# Altium PCB PCB.PcbDoc
Units mm, origin at the board's own origin, x right, y up, seen from the top; angles counter-clockwise.
Board outline 84.9 x 66.06 mm, 2 copper layers (Top Layer, Bottom Layer); 33 components, 31 nets, 158 pads, 69 vias.
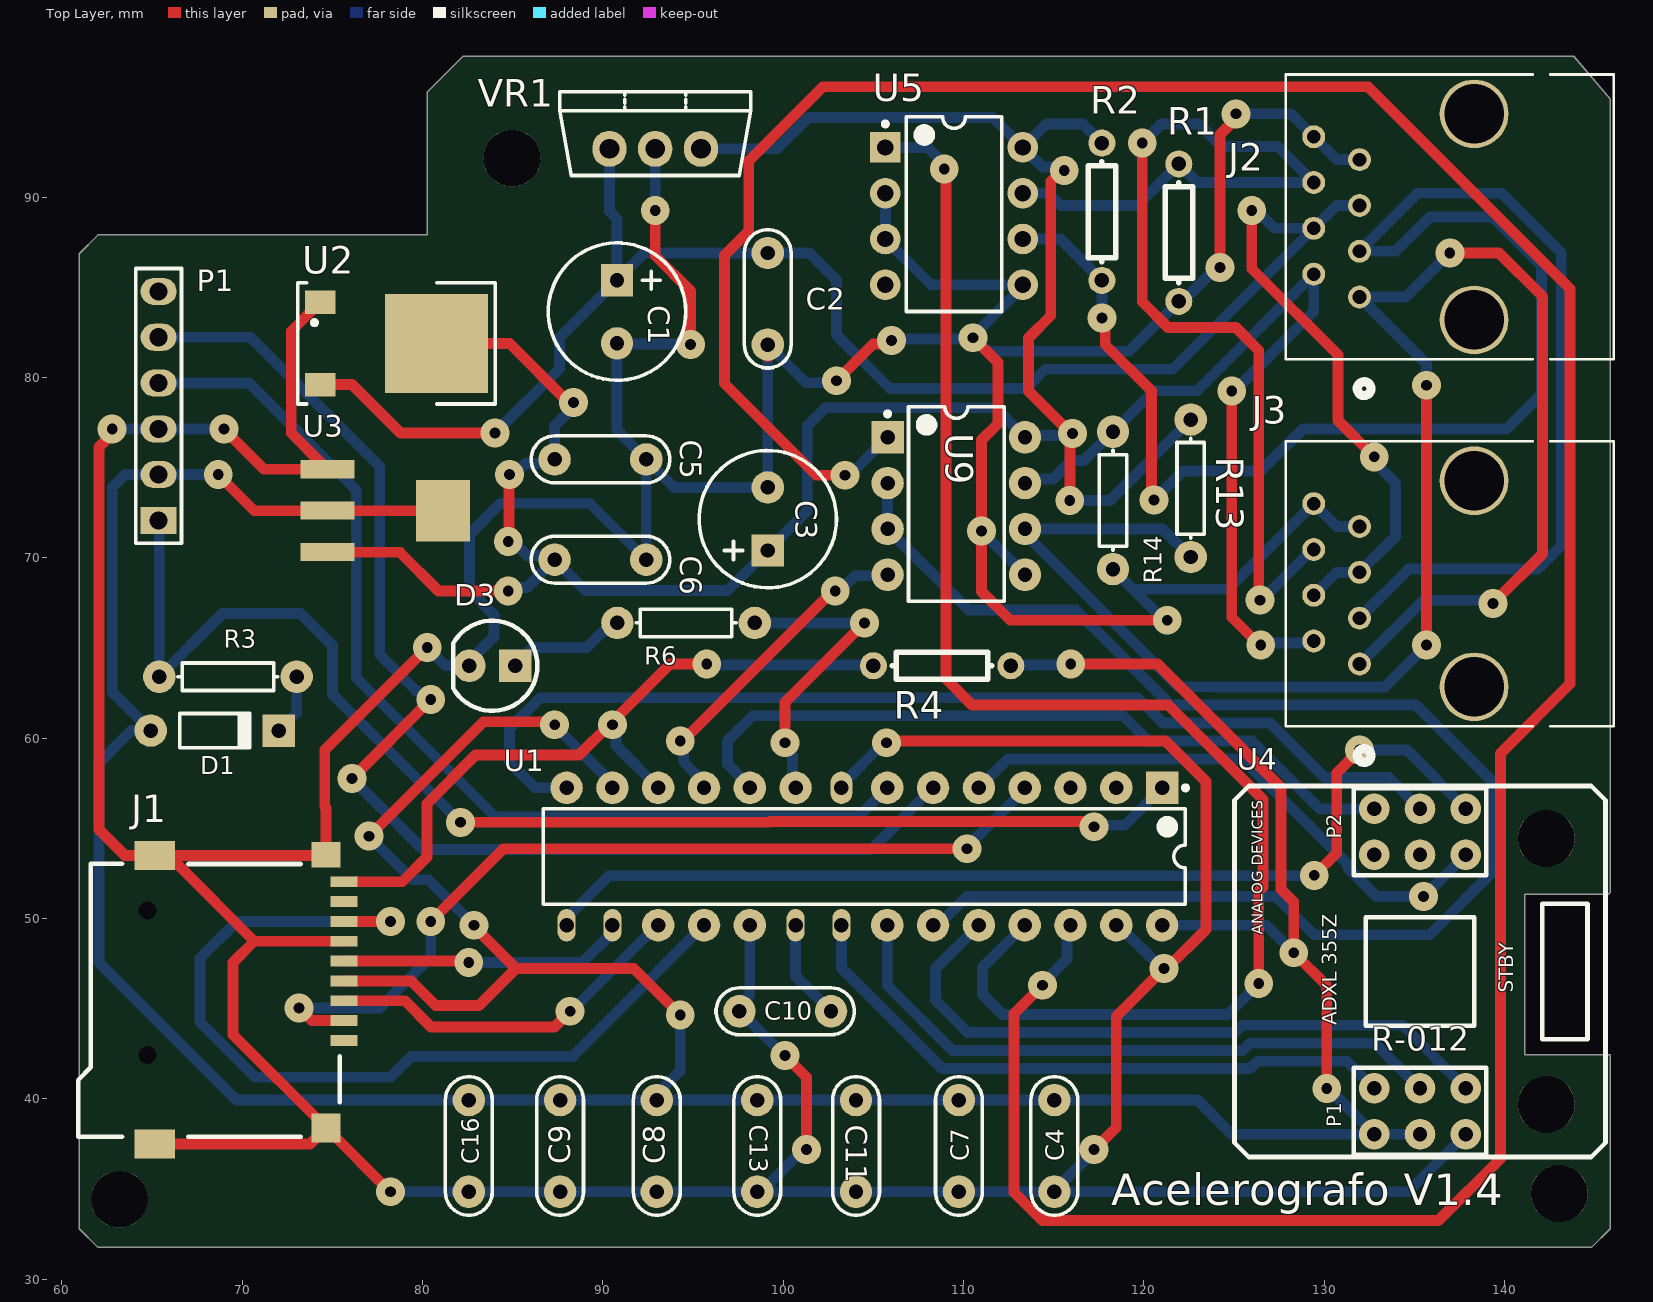
[diagram p0: Top Layer view]
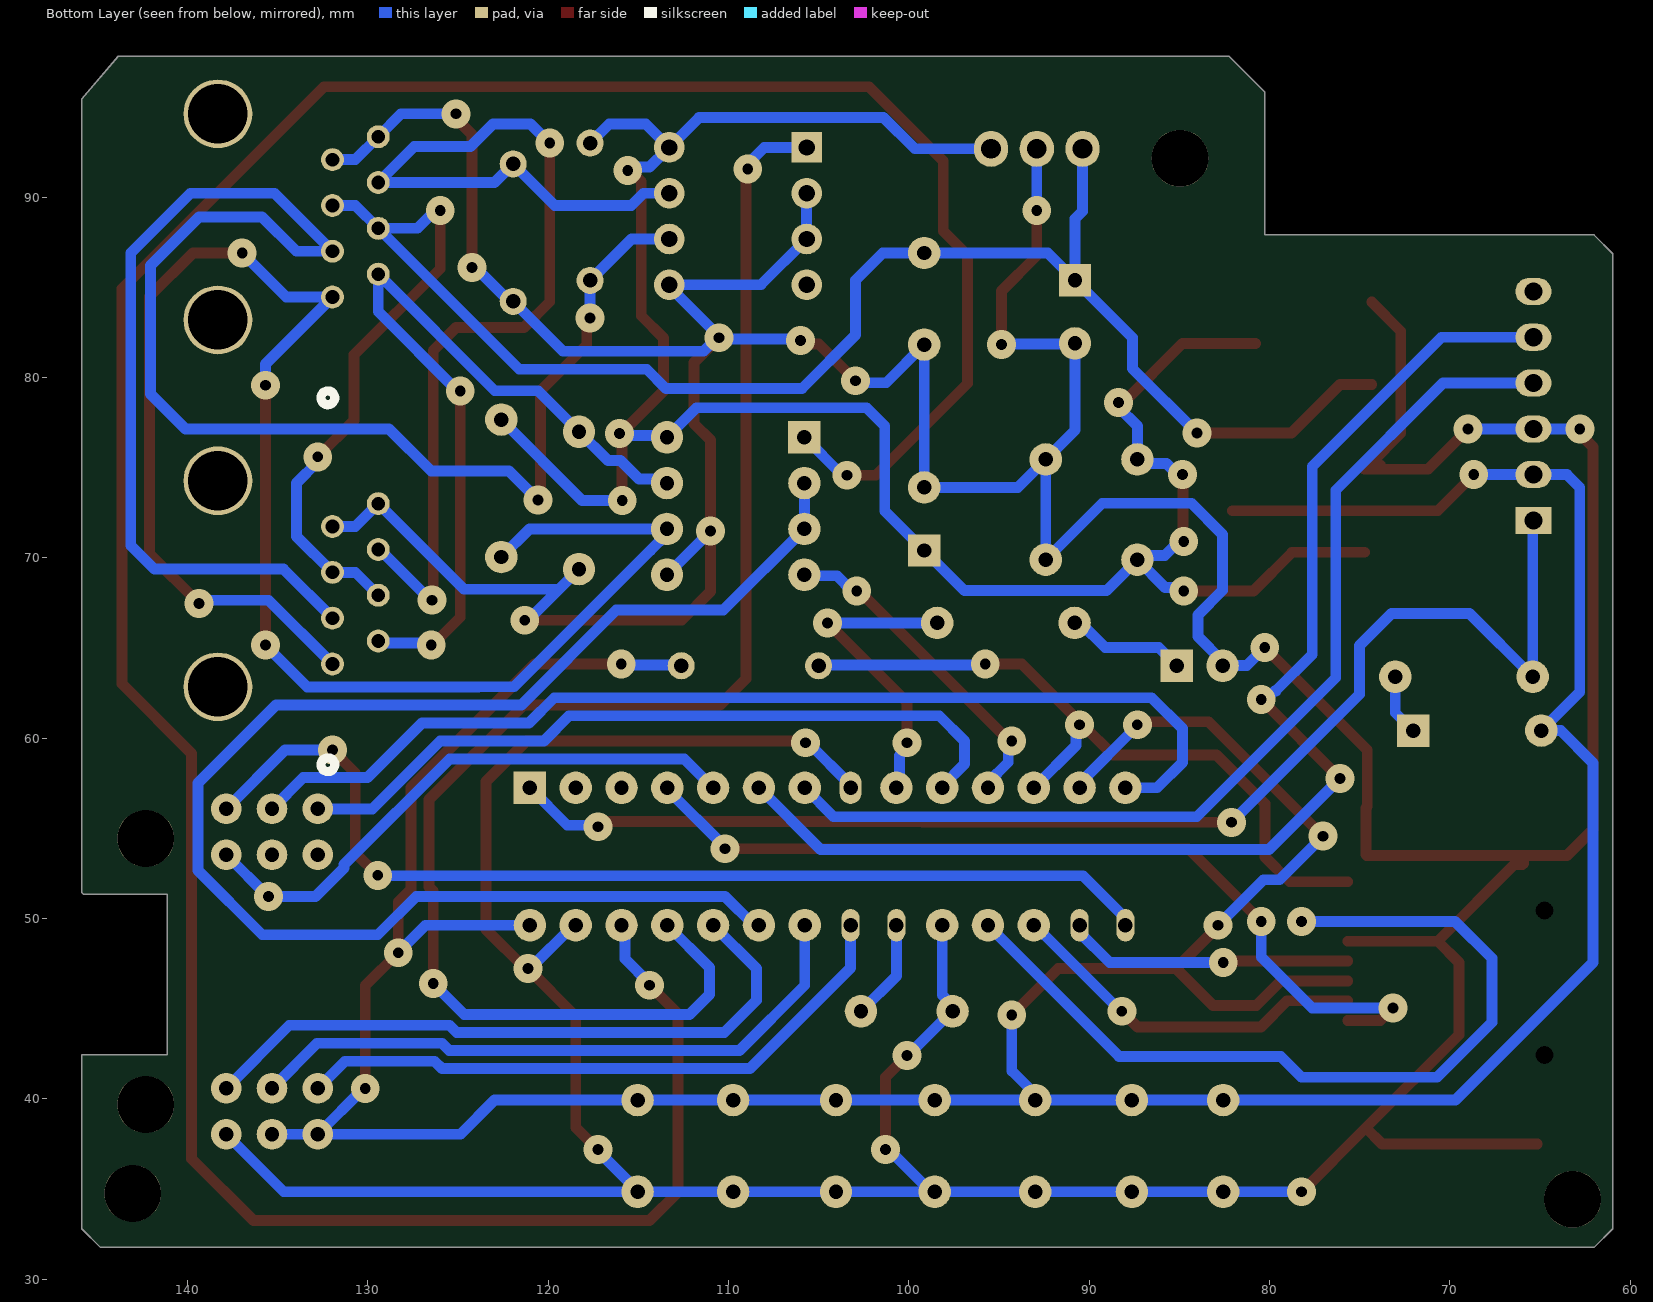
[diagram p1: Bottom Layer view, seen from below]

## Layer stack, top to bottom
Top Solder: solder mask 0.0102, Solder Resist, Dk 3.5
Top Layer: signal copper 0.0356
Dielectric 1: dielectric 0.32, FR-4, Dk 4.8
Bottom Layer: signal copper 0.0356
Bottom Solder: solder mask 0.0102, Solder Resist, Dk 3.5

## Board outline
141.12,42.442 141.12,51.343 145.769,51.343 145.86,51.434 145.86,57.252 145.86,66 145.86,95.429 143.832,97.811 82.241,97.811 80.26,95.83 80.26,87.898 62,87.898 60.96,86.858 60.96,32.79 62,31.75 144.82,31.75 145.86,32.79 145.86,42.442

## Design rules (kind name [scope] priority, off if disabled: settings)
Clearance [All] p1: gap=0.4 ignorepadtopadclearanceinfootprint=FALSE except(0.7: Arc-Poly Track-Poly SMDPad-Poly THPad-Poly Via-Poly Fill-Poly Poly-Poly Poly-Region Poly-Text)
HoleSize [All] p1: absolutevalues=TRUE maxlimit=20 minlimit=0.025 maxpercent=80.000 minpercent=20.000
PlaneClearance [All] p1: clearance=0.8
PlaneConnect [All] p1: planeconnectstyle=Relief reliefexpansion=0.6 reliefentries=4 reliefconductorwidth=0.4 reliefairgap=0.5
PolygonConnect [All] p1: connectstyle=Relief reliefconductorwidth=0.4 reliefentries=4 polygonreliefangle="90 Angle" airgapwidth=0.5
RoutingVias [All] p1: holewidth=0.6 width=1.6 viastyle="Through Hole" minholewidth=0.6 minwidth=1.4 maxholewidth=0.6 maxwidth=1.6
SolderMaskExpansion [All] p1: expansion=0.102 istentingtop=FALSE
Width [All] p1: maxlimit=1.5 minlimit=0.02 preferedwidth=0.6 minimp=50.000000 maximp=50.000000 favimp=50.000000
27 further rules are at their usual default settings.

## Components (designator, comment, footprint, x,y, rotation, side; value= is the part's Value field where it differs from the comment)
C1 "Cap" C100UFB 90.784,85.388 r270 top value=470uF
C2 "Cap" RAD0.2 99.143,86.897 r270 top value=100nF
C3 "Cap" C100UFB 99.143,70.399 r90 top value=220uF
C4 "Cap" RAD0.2 115.038,39.92 r270 top value=100nF
C5 "Cap" RAD0.2 87.325,75.453 r0 top value=100nF
C6 "Cap" RAD0.2 87.325,69.891 r0 top value=10nF
C7 "Cap" RAD0.2 109.744,39.92 r270 top value=100nF
C8 "Cap" RAD0.2 92.992,39.92 r270 top value=100nF
C9 "Cap" RAD0.2 87.626,39.92 r270 top value=10nF
C10 "Cap" RAD0.2 102.652,44.847 r180 top value=1uF
C11 "Cap" RAD0.2 104.037,39.92 r270 top value=100nF
C13 "Cap" RAD0.2 98.562,39.92 r270 top value=100nF
C16 "Cap" RAD0.2 82.567,39.92 r270 top value=100nF
D1 "1N914" DO-35 68.476,60.413 r0 top
D3 "LED3" LED2 83.867,64.009 r180 top
J1 "=Value" microSD 75.654,43.235 r90 top
J2 "54602-908LF" RJ45_CONN8_2-908LF_AMP 131.962,84.455 r90 top
J3 "54602-908LF" RJ45_CONN8_2-908LF_AMP 131.962,64.109 r90 top
P1 "Grabador" HDR1X6 65.361,72.066 r90 top
R1 "Res1" AXIAL-0.3#1 121.938,91.836 r270 top value=3K3
R2 "Res1" AXIAL-0.3#1 117.67,85.375 r90 top value=3K3
R3 "Res1" AXIAL-0.3#2 69.21,63.398 r0 top value=4K7
R4 "Res1" AXIAL-0.3#1 112.619,64.009 r180 top value=10K
R6 "Res1" AXIAL-0.3#2 94.615,66.386 r180 top value=1K
R13 "Res1" AXIAL-0.3#2 122.596,73.848 r90 top value=3K3
R14 "Res1" AXIAL-0.3#2 118.287,73.176 r270 top value=3K3
U1 "DSPIC33EP256MC202-I/SP" MCHP-SPDIP-SP28 104.499,53.431 r270 top
U2 "LM1117DT-5.0NOPB" NDP0003B 78.632,81.888 r0 top
U3 "LD33V" SOT-223 74.728,74.906 r270 top
U4 "ADXL355Z" ADXL355Z 135.312,47.053 r90 top
U5 "MAX485" MAX485#1 105.664,92.753 r270 top
U9 "MAX485" MAX485#2 105.789,76.676 r270 top
VR1 "Volt Reg" TO-220V 90.361,92.674 r0 top

## Footprints (in the part's own frame and the unit in brackets; to place one, negate y for a bottom-side part, rotate by r counter-clockwise, add the part's x,y. Pads: shape width x height; smd on the part's side, far side on the other; paste and mask are expansions set on the pad)
ADXL355Z [mm]
  round 1.7 hole 0.8: 1(-6.48,2.54) 2(-6.48,0) 3(-6.48,-2.54) 4(-9.02,2.54) 5(-9.02,0) 6(-9.02,-2.54) 7(9.02,2.54) 8(9.02,0) 9(9.02,-2.54) 10(6.48,2.54) 11(6.48,0) 12(6.48,-2.54)
  round 3.15 hole 3.15: ""(-7.375,-7) ""(7.375,-7)
  round 0 all layers, no hole paste-2539.97 mask+0: ""(-7.375,7) ""(7.375,7)
  silkscreen extent -10.29,-10.29 10.29,10.29
AXIAL-0.3#1 [mm]
  round 1.5 hole 0.8: 1(0,0) 2(7.62,0)
  silkscreen extent 1.04,-0.76 6.58,0.76
AXIAL-0.3#2 [mm] "Axial Device, Thru-Hole; 2 Leads; 0.3 in Pin Spacing"
  round 1.8 hole 0.8: 1(-3.81,0) 2(3.81,0)
  silkscreen extent -2.77,-0.76 2.77,0.76
C100UFB [mm]
  rect 1.8x1.8 hole 0.8: 1(0,0)
  round 1.8 hole 0.8: 2(3.5,0)
  silkscreen extent -2.07,-3.81 5.55,3.81
DO-35 [mm] "Diode, Axial; Body 3.8 x 1.9 mm (LxDia. max), Lead Dia. 0.53 mm (max)"
  round 1.8 hole 0.8: 1(-3.55,0)
  rect 1.8x1.8 hole 0.8: 2(3.55,0)
  silkscreen extent -1.95,-0.95 2.05,0.95
HDR1X6 [mm] "Connector; Header; 6 Position"
  rect 1.5x2 hole 1: 1(0,0)
  oval 1.5x2 hole 1: 2(2.54,0) 3(5.08,0) 4(7.62,0) 5(10.16,0) 6(12.7,0)
  silkscreen extent -1.27,-1.27 13.97,1.27
LED2 [mm]
  rect 1.8x1.8 hole 0.8: 1(-1.27,0)
  round 1.8 hole 0.8: 2(1.27,0)
  silkscreen extent -2.5,-2.5 2.17,2.5
MAX485#1 [mm]
  rect 1.7x1.7 hole 0.9: 1(0,0)
  round 1.7 hole 0.9: 2(2.54,0) 3(5.08,0) 4(7.62,0) 5(7.62,7.62) 6(5.08,7.62) 7(2.54,7.62) 8(0,7.62)
  silkscreen extent -1.69,-0.12 9.1,6.46, body extent -1.64,0.2 9,7.41, height 5.34
MAX485#2 [mm]
  rect 1.8x1.8 hole 0.8: 1(0,0)
  round 1.8 hole 0.8: 2(2.54,0) 3(5.08,0) 4(7.62,0) 5(7.62,7.62) 6(5.08,7.62) 7(2.54,7.62) 8(0,7.62)
  silkscreen extent -1.69,-0.12 9.1,6.46, body extent -1.64,0.2 9,7.41, height 5.34
MCHP-SPDIP-SP28 [mm] "DIP, 28-Leads, Body 34.86x6.79mm, Pitch 2.54mm"
  rect 1.8x1.8 hole 0.8: 1(-3.81,16.51)
  round 1.8 hole 0.8: 2(-3.81,13.97) 3(-3.81,11.43) 4(-3.81,8.89) 5(-3.81,6.35) 6(-3.81,3.81) 7(-3.81,1.27) 9(-3.81,-3.81) 10(-3.81,-6.35) 11(-3.81,-8.89) 12(-3.81,-11.43) 13(-3.81,-13.97) 14(-3.81,-16.51) 17(3.81,-11.43) 18(3.81,-8.89) 19(3.81,-6.35) 22(3.81,1.27) 23(3.81,3.81) 24(3.81,6.35) 25(3.81,8.89) 26(3.81,11.43) 27(3.81,13.97) 28(3.81,16.51)
  oval 1.8x1.2 hole 0.8: 8(-3.81,-1.27)
  oval 1.8x1 hole 0.8: 15(3.81,-16.51) 16(3.81,-13.97) 20(3.81,-3.81) 21(3.81,-1.27)
  silkscreen extent -3.93,-17.8 2.65,17.94, body extent -3.95,-17.77 3.95,17.77, height 5.08
microSD [mm]
  rect 0.6x1.5 smd: 1(0,0) 2(1.1,0) 3(2.2,0) 4(3.3,0) 5(4.4,0) 6(5.5,0) 7(6.6,0) 8(7.7,0) 9(8.8,0)
  rect 1.6x2.26 smd: 10(-5.75,10.5) 10(10.25,10.5)
  rect 1.6x1.6 smd: 10(-4.85,1)
  rect 1.4x1.6 smd: 10(10.3,1)
  round 0.8 hole 1: ""(-0.8,10.9) ""(7.2,10.9)
  silkscreen extent -5.33,0.25 9.8,14.75, body extent -5.75,-0.35 10.25,14.9, height 1.95
NDP0003B [mm]
  rect 1.7x1.3 smd paste+0 mask+0.051: 1(-4.3,2.285) 3(-4.3,-2.285)
  rect 5.7x5.5 smd paste+0 mask+0.051: 4(2.14,0)
  silkscreen extent -5.55,-3.36 5.39,3.36, body extent -4.83,-3.27 5.08,3.27, height 2.55
RAD0.2 [mm]
  round 1.8 hole 0.8: 1(0,0) 2(5.08,0)
  silkscreen extent -1.3,-1.3 6.38,1.3
RJ45_CONN8_2-908LF_AMP [mil] "Conector hembra RJ45 Plastico"
  round 50 / inner round 60 / far side round 50 hole 30 paste-99999 mask+0: 1(0,0) 2(50,100) 3(100,0) 4(150,100) 5(200,0) 6(250,100) 7(300,0) 8(350,100)
  round 150 / inner round 60 / far side round 150 hole 130 paste-99999 mask-75: 9(-50,-250) 10(400,-250)
  silkscreen extent -215,-555 486,161
SOT-223 [mm]
  rect 1x3 smd: 1(4.6,0) 2(0,0) 3(2.3,0)
  rect 3.4x3 smd: 3(2.3,6.4)
  body extent -1.2,1.41 5.8,5, height 1.1
TO-220V [mm] "D2-PAK, 4-Leads, Body 8.8x10.4mm, Pitch 2.54mm, Lead Span 15.1mm, IPC Medium Density"
  oval 1.9x2 hole 1.1: 1(0,0) 2(2.54,0) 3(5.08,0)
  silkscreen extent -2.75,-1.48 7.83,3.18, body extent -2.56,-1.8 7.6,2.8, height 18.9

## Part data
C1 C2 C3 C4 C5 C6 C7 C8 C9 C10 C11 C13 C16: "Capacitor", LatestRevisionDate=17-Jul-2002, LatestRevisionNote="Re-released for DXP Platform.", PackageDescription="Radial Cap, Thru-Hole; 2 Leads; 0.3 in Pin Spacing", PackageReference=RAD-0.3, Published=8-Jun-2000, Publisher="Altium Limited"
D1: library part "Diode 1N914", "High Conductance Fast Diode", Code_JEDEC=DO-204-AH, ComponentLink1Description="Manufacturer Link", ComponentLink1URL=http://www.fairchildsemi.com/, ComponentLink2Description=Datasheet, ComponentLink2URL=http://www.fairchildsemi.com/ds/1N%2F1N4448.pdf, DatasheetVersion=1997, LatestRevisionDate=17-Jul-2002, LatestRevisionNote="Re-released for DXP Platform.", PackageDescription="Diode, Axial; Body 3.8 x 1.9 mm (LxDia. max), Lead Dia. 0.53 mm (max)", PackageReference=DO-35, Published=8-Jun-2000, Publisher="Altium Limited"
D3: "Typical BLUE SiC LED", DatasheetVersion=16-Apr-2002, LatestRevisionDate=17-Dec-2003, LatestRevisionNote="PCB Footprint replaced.", PackageDescription="SM LED; 2 C-Bend Leads; Body 3.5 x 2.8 x 1.9 mm, inc leads (LxWxH typ)", PackageReference=3.5X2.8X1.9, PackageVersion=16-Apr-2002, Published=8-Jun-2000, Publisher="Altium Limited"
J1: library part MICROSD, "=Description"
J2 J3: "Jack Modular Connector 8p8c _RJ45, Ethernet_ 90Â° Angle _Right_ Unshielded Cat3", Package=None, Digi-Key_Part_Number=609-1046-ND, Digi-Key_Purchase_URL=https://www.digikey.com/product-detail/en/amphenol-icc-fci/54602-908LF/609-1046-ND/1001360?utm_source=snapeda&utm_medium=aggregator&utm_campaign=symbol, MF="Amphenol ICC", MP=54602-908LF, SnapEDA_Link=https://www.snapeda.com/parts/54602-908LF/Amphenol%20FCI/view-part/1356963/?ref=snap
P1: library part "Header 6", "Header, 6-Pin", LatestRevisionDate=17-Jul-2002, LatestRevisionNote="Re-released for DXP Platform.", Publisher="Altium Limited"
R1 R2 R3 R4 R6 R13 R14: "Resistor", LatestRevisionDate=17-Jul-2002, LatestRevisionNote="Re-released for DXP Platform.", PackageDescription="Axial Device, Thru-Hole; 2 Leads; 0.3 in Pin Spacing", PackageReference=AXIAL-0.3, Published=8-Jun-2000, Publisher="Altium Limited"
U1: "16-Bit Microcontroller and Digital Signal Controller with High-Speed PWM, Op Amps and Advanced Analog, 70 MIPS, 21 I/O, GPIO, -40 to 85 degC, 28-pin SPDIP (SP28), Tube", Manufacturer=Microchip, Supplier Part Number 1=DSPIC33EP256MC202-I/SP-ND, ComponentLink1Description="Manufacturer URL", ComponentLink1URL=http://www.microchip.com, ComponentLink2Description=Datasheet, ComponentLink2URL=http://ww1.microchip.com/downloads/en/DeviceDoc/70657F.pdf, ComponentLink3Description="Package Specification", ComponentLink3URL=http://www.microchip.com/stellent/groups/techpub_sg/documents/packagingspec/en012702.pdf, ComponentLink4Description="Product URL", ComponentLink4URL=http://www.microchip.com/dsPIC33EP256MC202, DatasheetVersion="Rev. F", Mounting Technology="Through Hole", PackageDescription="28-Lead Plastic Dual In-Line, 34.86 x 6.79 mm Body, 2.54 mm Pitch", PackageReference=SPDIP-SP28, PackageVersion=C04-070B, PartNumber=DSPIC33EP256MC202-I/SP, Supplier 1=Digi-Key, Supplier 2=Farnell, Supplier 3=Newark, Supplier 4=Mouser, Supplier Part Number 2=2212194, Supplier Part Number 3=66T8001, Supplier Part Number 4=579-PC33256MC202ISP
U2: "No Description Available", Mfr_Name="Texas Instruments", RefDes=RefDes, TYPE=TYPE
U3: "High-Performance 16-bit Digital Signal Controller, 24 KB Flash, 2 KB SRAM, 1 KB EEPROM, 40-Pin PDIP, Industrial Temperature"
VR1: "Voltage Regulator", LatestRevisionDate=29-May-2009, LatestRevisionNote="IPC-7351 Footprint Added.", PackageDescription="3-Pin Transistor Outline Package 2.54 mm Pitch, 15.1 mm Lead Span", PackageReference=D2PAK, Published=24-Mar-1999, Publisher="Altium Limited"

## Free pads (board coordinates)
  round 3.15 hole 3.15: ""(63.193,34.425) ""(84.96,92.148) ""(143.032,34.748)

## Via types
v1: diameter 1.6, hole 0.6, Top Layer to Bottom Layer, 69 vias

## Nets (pads, with @x,y where several pads share a name; then routed paths per layer and width w, separated by ;. In a path a pad name is that pad's centre, name@x,y a point inside that pad or via, vN(x,y) a via of type N, cw(c..) or ccw(c..) an arc to the next point about the centre after c; other vN are vias at no path point)
5V: C3.1 C5.1 C6.1 R2.2 R13.2 U2.4 U3.1 U5.8 U9.8 VR1.3 | length 130.3
  Top Layer w0.6: U3.1 78.741,70.306 80.885,68.162 v1(84.754,68.162) ; U2.4 84.821,81.888 88.096,78.612 v1(88.366,78.612) ; v1(84.754,70.902) 84.788,70.935 84.788,74.573 v1(84.821,74.606) ; U5.8@113.284,92.456 U5.8 ; v1(115.583,91.468) 115.446,91.468 114.834,90.855 114.834,83.422 113.598,82.186 113.598,79.251 115.963,76.886 v1(116.046,76.886) 115.91,76.749 115.91,73.195 v1(115.891,73.176)
  Bottom Layer w0.6: v1(84.754,68.162) 84.946,68.354 85.788,68.354 C6.1 ; v1(84.754,70.902) 85.025,70.902 85.806,70.121 87.096,70.121 C6.1 ; v1(84.821,74.606) 85.091,74.606 85.709,75.223 87.096,75.223 C5.1 87.555,75.682 87.325,75.912 87.325,77.301 88.366,78.342 v1(88.366,78.612) ; VR1.3 99.659,92.674 101.397,94.412 111.625,94.412 113.427,92.61 114.378,91.659 115.392,91.659 v1(115.583,91.468) ; U5.8 114.584,94.053 116.612,94.053 R2.2 ; v1(115.891,73.176) 118.114,73.176 R13.2 ; v1(116.046,76.886) 115.941,76.781 113.514,76.781 U9.8 111.769,78.316 102.343,78.316 101.328,77.301 101.328,72.584 C3.1 96.918,68.174 89.043,68.174 C6.1
_PGEC1: P1.5 U1.6 | length 71.3
  Top Layer w0.6: v1(76.082,57.762) 76.082,57.764 80.457,62.139 v1(80.457,62.141)
  Bottom Layer w0.6: P1.5 70.454,82.226 77.628,75.051 77.628,64.635 79.646,62.617 79.71,62.617 80.186,62.141 v1(80.457,62.141) ; v1(76.082,57.762) 80.018,53.826 104.895,53.826 U1.6 U1.6@108.08,57.47
_PGED1: P1.4 U1.7 | length 57.3
  Bottom Layer w0.6: P1.4 70.383,79.686 76.327,73.742 76.327,63.342 84.028,55.641 104.169,55.641 U1.7 U1.7@105.576,57.241
A: J2.1 J3.1 R13.1 U9.6 | length 96.9
  Top Layer w0.6: v1(135.669,65.151) v1(135.669,79.566) ; v1(136.966,86.9) 139.692,86.9 142.099,84.494 142.099,70.213 v1(139.356,67.47)
  Bottom Layer w0.6: R13.1 121.038,71.596 U9.6 113.409,71.318 114.331,70.396 114.336,70.396 121.891,62.841 123.856,62.841 123.858,62.839 133.357,62.839 v1(135.669,65.151) ; J3.1 135.499,67.646 139.18,67.646 v1(139.356,67.47) ; v1(135.669,79.566) 135.669,80.748 J2.1 134.521,84.455 v1(136.966,86.9)
ADXL_DRDY: U1.24 U4.3 | length 36.9
  Bottom Layer w0.6: U1.24 108.444,47.216 108.444,45.463 110.235,43.672 125.064,43.672 125.465,44.073 134.352,44.073 U4.3
ADXL_INT1: U1.21 U4.1 | length 35
  Bottom Layer w0.6: U1.21 103.229,47.244 108.801,41.672 125.892,41.672 126.294,42.073 131.272,42.073 U4.1
ADXL_INT2: U1.22 U4.2 | length 35.6
  Bottom Layer w0.6: U1.22 105.769,46.29 109.387,42.672 125.478,42.672 125.879,43.073 132.812,43.073 U4.2
B: J2.2 J3.2 R14.1 U9.7 | length 47.1
  Top Layer w0.6: v1(124.874,79.251) 124.874,66.699 126.422,65.151 v1(126.483,65.151)
  Bottom Layer w0.6: U9.7 113.638,74.365 114.959,74.365 115.979,75.386 116.687,75.386 R14.1 120.56,79.258 122.955,79.258 J2.2 129.422,83.648 125.025,79.251 v1(124.874,79.251) ; v1(126.483,65.151) 126.596,65.265 129.308,65.265 J3.2
CONSD: J1.9 R4.2 U1.12 | length 40.7
  Top Layer w0.6: J1.9 78.871,52.035 80.241,53.405 80.241,56.357 82.939,59.055 88.678,59.055 90.363,60.74 v1(90.529,60.74) ; v1@90.446,60.823 93.732,64.109 v1(95.758,64.109)
  Bottom Layer w0.6: v1(90.529,60.74) 90.721,60.548 90.721,59.589 U1.12 ; v1(95.758,64.109) 95.808,64.059 104.949,64.059 R4.2
DSPIC_RX: U1.26 U9.1 | length 171.8
  Top Layer w0.6: v1(103.429,74.573) 101.837,74.573 96.735,79.674 96.735,86.752 98.094,88.11 98.094,91.998 102.211,96.115 132.432,96.115 143.629,84.918 143.629,63.008 139.772,59.15 139.772,36.668 136.344,33.24 114.375,33.24 112.801,34.815 112.801,44.716 v1(114.375,46.29)
  Bottom Layer w0.6: v1(103.429,74.573) 103.686,74.573 U9.1 ; v1(114.375,46.29) 114.375,46.396 115.736,47.757 115.736,49.427 U1.26
DSPIC_TX: U1.11 U9.4 | length 18.5
  Top Layer w0.6: v1(94.292,59.839) 94.426,59.839 102.75,68.162 v1(102.884,68.162)
  Bottom Layer w0.6: v1(94.292,59.839) 94.483,59.648 94.483,58.66 95.609,57.534 U1.11 ; v1(102.884,68.162) 103.155,68.162 103.989,68.996 105.729,68.996 U9.4
FUENTE_12V: C1.1 C2.1 J2.4 J2.5 J3.4 J3.5 U2.3 VR1.1 | length 111.6
  Top Layer w0.6: U2.3 76.082,79.603 78.773,76.911 v1(84.022,76.911) ; v1(125.984,89.253) 125.984,86.028 130.759,81.253 130.759,77.607 v1(132.772,75.595)
  Bottom Layer w0.6: v1(84.022,76.911) 87.594,80.484 87.594,82.198 C1.1 ; VR1.1 90.361,89.217 90.784,88.793 C1.1 92.294,86.897 C2.1 101.444,86.897 102.953,85.388 102.953,82.352 105.93,79.375 113.46,79.375 114.534,80.449 121.606,80.449 J2.4 ; v1(125.984,89.253) 126.255,89.253 127.243,88.265 J2.4 ; J3.4 130.692,69.189 J3.5 133.955,71.182 133.955,74.141 132.772,75.324 v1(132.772,75.595) ; J2.5 130.692,89.535 J2.4
GND: C1.2 C2.2 C3.2 C4.2 C5.2 C6.2 C7.2 C8.2 C9.2 C10.2 C11.2 C13.2 C16.2 D3.2 J1.6 J1.10 J2.7 J2.8 J3.7 J3.8 P1.3 R1.2 R14.2 U1.8 U1.19 U1.27 U2.1 U3.2 U4.6 U5.2 U5.3 U5.5 U9.5 VR1.2 | length 421.2
  Top Layer w0.6: v1(62.789,77.146) 62.789,76.875 62.052,76.138 62.052,54.932 63.5,53.485 65.155,53.485 J1.10@65.92,53.485 ; J1.10@65.155,37.485 73.754,37.485 J1.10@74.654,38.385 ; v1(68.986,77.146) 68.986,77.12 71.201,74.906 U3.2@73.825,74.906 ; U3.2@73.825,75.106 74.025,74.906 U3.2@74.376,74.906 ; U2.1 72.72,82.561 72.72,76.913 74.376,75.257 U3.2@74.376,74.906 ; U3.2 U3.2@74.376,74.906 ; J1.6 70.67,48.735 ; v1(78.22,34.84) 78.199,34.84 J1.10@74.654,38.385 ; v1(80.26,65.014) 74.582,59.336 74.582,56.196 74.654,56.123 74.654,53.535 74.604,53.485 J1.10@65.92,53.485 ; v1(92.901,89.253) 92.901,86.743 94.862,84.782 v1(94.862,81.817) ; C2.2@99.143,81.153 C2.2 ; v1(100.091,42.393) 101.295,41.188 v1(101.295,37.175) ; v1(102.953,79.816) 104.99,81.852 105.807,81.852 v1(105.999,82.044) ; v1(105.729,59.74) 105.832,59.842 121.197,59.842 123.442,57.598 123.442,49.389 121.269,47.216 v1(121.122,47.216) 118.469,44.563 118.469,38.407 v1(117.237,37.175) ; v1(110.525,82.198) 111.905,80.818 111.905,77.434 110.998,76.528 v1(110.998,71.473) 110.998,68.123 112.589,66.532 v1(121.299,66.532) ; v1(124.225,86.1) 124.225,93.465 125.105,94.344 v1(125.105,94.615) ; J2.8@129.422,93.164 J2.8 ; J1.10@65.92,53.485 65.92,53.05 65.985,52.985 66.42,52.985 70.67,48.735 ; 70.67,48.735 69.494,47.559 69.494,43.545 J1.10@74.654,38.385
  Bottom Layer w0.6: v1(62.789,77.146) P1.3 v1(68.986,77.146) ; v1(78.22,34.84) C16.2 85.09,34.84 C9.2 90.297,34.84 C8.2 95.758,34.84 C13.2 C13.2@98.761,34.84 ; v1(80.26,65.014) 81.258,64.016 82.59,64.016 D3.2 82.597,64.259 83.967,65.629 83.967,66.828 82.597,68.198 82.597,71.291 84.331,73.025 89.271,73.025 C6.2 C5.2 ; v1(92.901,89.253) VR1.2 ; v1(94.862,81.817) 94.827,81.852 90.819,81.852 C1.2 90.784,77.074 C5.2 ; U1.19 98.149,45.75 97.572,45.172 C10.2 97.604,44.847 100.059,42.393 v1(100.091,42.393) ; v1(101.295,37.175) 101.096,37.175 C13.2@98.761,34.84 ; v1(102.953,79.816) 102.845,79.707 101.253,79.707 C2.2 C3.2 93.959,73.899 C5.2 ; U1.8 103.229,57.39 105.579,59.74 v1(105.729,59.74) ; U5.2 U5.3 108.204,85.133 U5.5@113.149,85.133 ; v1(105.999,82.044) 106.076,82.121 110.448,82.121 v1(110.525,82.198) ; v1(110.998,71.473) 110.998,71.47 113.409,69.059 U9.5 ; U5.5 113.284,85.045 110.525,82.286 v1(110.525,82.198) ; C4.2@115.288,34.84 134.659,34.84 U4.6 ; v1(117.237,37.175) 117.237,37.108 115.038,34.908 C4.2 C7.2 106.883,34.84 C11.2 101.295,34.84 C13.2@98.761,34.84 ; R14.2 119.403,68.25 ; U1.27 118.593,49.621 120.998,47.216 v1(121.122,47.216) ; v1(121.299,66.532) 121.122,66.532 119.403,68.25 ; v1(124.225,86.1) 124.024,86.1 122.139,84.216 R1.2 119.171,81.449 111.376,81.449 110.627,82.198 v1(110.525,82.198) ; v1(125.105,94.615) 128.152,94.615 J2.8 130.692,92.075 J2.7 ; J3.7 130.692,71.729 J3.8 124.673,68.25 119.403,68.25
INT_SINC: U1.25 U5.1 | length 84.2
  Top Layer w0.6: v1(108.928,91.564) 109.025,91.468 109.025,63.293 110.477,61.841 121.353,61.841 126.599,56.595 126.599,51.743 126.374,51.518 v1(126.374,46.396)
  Bottom Layer w0.6: U5.1 108.011,92.753 ; 108.011,92.752 108.928,91.835 v1(108.928,91.564) ; U1.25 111.044,47.275 111.044,45.783 112.155,44.672 124.65,44.672 v1(126.374,46.396)
MAX485_MS: U1.23 U9.2 U9.3 | length 81
  Bottom Layer w0.6: U9.2 U9.3 110.292,67.092 116.225,67.092 121.477,61.841 123.442,61.841 123.444,61.839 135.094,61.839 139.421,57.512 139.421,52.654 135.856,49.09 129.445,49.09 127.314,51.221 110.187,51.221 108.587,49.621 U1.23
MCLR: P1.1 R3.1 U1.1 | length 73.2
  Top Layer w0.6: v1(82.104,55.326) 99.223,55.326 99.261,55.364 116.683,55.364 116.966,55.081 v1(117.237,55.081)
  Bottom Layer w0.6: P1.1 65.4,72.027 R3.1 68.905,66.904 73.228,66.904 74.999,65.133 74.999,62.431 v1(82.104,55.326) ; v1(117.237,55.081) 117.325,55.168 118.937,55.168 U1.1
NetC10_1: C10.1 U1.20 | length 5.6
  Bottom Layer w0.6: U1.20 100.689,46.81 C10.1
NetD1_2: D1.2 R3.2 | length 3.4
  Bottom Layer w0.6: D1.2 73.02,61.407 R3.2
NetD3_1: D3.1 R6.2 | length 6.7
  Bottom Layer w0.6: D3.1 86.142,65.014 89.108,65.014 90.48,66.386 R6.2
SINC_A: J2.3 J3.3 R2.1 U5.6 | length 104.9
  Top Layer w0.6: v1(117.67,83.289) 117.862,83.098 117.862,81.815 120.421,79.255 120.421,73.333 v1(120.56,73.195) ; J3.3@131.845,66.532 J3.3
  Bottom Layer w0.6: U5.6 115.372,87.673 R2.1 v1(117.67,83.289) ; v1(120.56,73.195) 122.168,74.803 126.483,74.803 128.819,77.14 140.108,77.14 142.052,79.084 142.052,86.203 139.356,88.9 135.86,88.9 133.955,86.995 J2.3 135.18,90.213 139.828,90.213 143.141,86.9 143.141,70.678 141.828,69.366 134.679,69.366 J3.3
SINC_B: J2.6 J3.6 R1.1 U5.7 | length 63.7
  Top Layer w0.6: v1(119.913,92.995) 119.913,84.19 121.337,82.766 125.107,82.766 126.374,81.499 126.374,67.716 v1(126.444,67.646)
  Bottom Layer w0.6: U5.7 114.716,90.213 115.395,89.535 119.637,89.535 R1.1 ; v1(119.913,92.995) 120.971,94.053 123.059,94.053 124.309,92.803 127.423,92.803 J2.6 122.968,90.805 R1.1 ; R1.1@121.694,91.836 R1.1 ; v1(126.444,67.646) 126.526,67.646 129.339,70.459 J3.6
SPI1_DSPIC_SS: J1.2 U1.4 | length 49.3
  Top Layer w0.6: v1(73.154,45.034) 73.854,44.335 J1.2 ; v1(80.457,49.831) 84.49,53.864 v1(110.187,53.864)
  Bottom Layer w0.6: v1(73.154,45.034) 77.628,45.034 80.457,47.863 v1(80.457,49.831) ; v1(110.187,53.864) 110.187,53.951 113.389,57.154 U1.4
SPI1_MISO: J1.7 U1.18 | length 50.2
  Top Layer w0.6: J1.7 v1(78.22,49.835)
  Bottom Layer w0.6: v1(78.22,49.835) 69.703,49.835 67.661,47.793 67.661,44.241 70.714,41.188 78.22,41.188 79.378,42.346 88.334,42.346 U1.18
SPI1_MOSI: J1.3 U1.17 | length 20.3
  Top Layer w0.6: J1.3 79.027,45.435 80.477,43.985 87.323,43.985 v1(88.186,44.847)
  Bottom Layer w0.6: v1(88.186,44.847) 88.241,44.847 93.014,49.621 U1.17
SPI1_SCK: J1.5 U1.16 | length 16
  Top Layer w0.6: J1.5 82.478,47.635 v1(82.564,47.549)
  Bottom Layer w0.6: v1(82.564,47.549) 88.858,47.549 90.529,49.221 U1.16
SPI2_ADXL355Z_CS: U1.10 U4.7 | length 41.7
  Bottom Layer w0.6: U1.10 98.149,57.323 96.918,58.555 96.918,59.842 98.315,61.24 118.836,61.24 120.235,59.841 122.613,59.841 122.615,59.839 125.985,59.839 129.751,56.073 U4.7
SPI2_MISO: U1.5 U4.12 | length 31.9
  Bottom Layer w0.6: U1.5 112.449,58.841 122.199,58.841 122.201,58.839 125.458,58.839 131.312,52.985 131.312,52.801 132.892,51.221 v1(135.499,51.221) 135.539,51.221 U4.12
SPI2_MOSI: U1.15 U4.9 | length 58.1
  Top Layer w0.6: v1(129.445,52.387) 130.692,53.634 130.692,58.069 v1(131.962,59.339)
  Bottom Layer w0.6: U1.15 88.12,49.751 88.12,50.151 90.333,52.364 129.422,52.364 v1(129.445,52.387) ; v1(131.962,59.339) 134.586,59.339 U4.9
SPI2_SCK: U1.14 U4.8 | length 59.4
  Bottom Layer w0.6: U1.14 86.229,57.241 84.821,58.649 84.821,60.525 86.535,62.24 119.664,62.24 121.063,60.841 123.028,60.841 123.029,60.839 126.99,60.839 130.022,57.807 133.578,57.807 U4.8
TEST1: R6.1 U1.9 | length 17.3
  Top Layer w0.6: v1(100.091,59.74) 100.091,61.978 v1(104.499,66.386)
  Bottom Layer w0.6: R6.1 v1(104.499,66.386) ; v1(100.091,59.74) 100.091,59.469 100.519,59.041 100.519,57.411 U1.9
VCC: C4.1 C7.1 C8.1 C9.1 C11.1 C13.1 C16.1 D1.1 J1.4 P1.2 R4.1 U1.13 U1.28 U3.3 U4.4 U4.5 | length 229
  Top Layer w0.6: v1(68.67,74.606) 70.67,72.606 74.728,72.606 81.128,72.606 U3.3@82.054,72.606 ; J1.4 79.373,46.535 80.735,45.172 83.13,45.172 85.176,47.219 ; v1(77.028,54.559) 83.376,60.906 87.16,60.906 v1(87.327,60.74) ; v1(82.848,49.621) 82.848,49.547 85.176,47.219 ; v1(94.292,44.642) 91.716,47.219 85.176,47.219 ; v1(115.941,64.109) 120.752,64.109 127.599,57.262 127.599,51.616 128.312,50.903 v1(128.312,48.098) 130.137,46.273 v1(130.137,40.573)
  Bottom Layer w0.6: v1(68.67,74.606) P1.2 63.5,74.606 62.789,73.894 62.789,62.55 D1.1 63.842,60.413 62.052,58.623 62.052,47.549 69.681,39.92 C16.1 85.09,39.92 C9.1 90.297,39.92 C8.1 ; v1(77.028,54.559) 79.445,52.142 80.326,52.142 v1(82.848,49.621) v1@82.879,49.621 ; v1(87.327,60.74) 87.327,60.676 90.529,57.474 U1.13 ; v1(94.292,44.642) 94.292,41.545 92.992,40.245 C8.1 ; R4.1 112.669,64.059 115.891,64.059 v1(115.941,64.109) ; U1.28 126.793,49.621 128.312,48.102 v1(128.312,48.098) ; v1(130.137,40.573) 130.232,40.573 U4.4 U4.5 ; U4.4@132.477,38.033 124.862,38.033 122.975,39.92 C4.1 C7.1 106.883,39.92 C11.1 101.295,39.92 C13.1 95.758,39.92 C8.1
pads on no net: J1. J1.1 J1.8 J2.9 J2.10 J3.9 J3.10 P1.6 U1.2 U1.3 U4. U4.10 U4.11 U5.4

## Silkscreen, mask and mechanical layers (free items; w line width, h text height)
Top Overlay:
  text "R-012" at 132.597,42.218 h2.3
  text "Acelerografo V1.4" at 118.183,33.497 h3
Mechanical 7:
  lines w0.7: 143.832,97.811 104.232,97.811 82.241,97.811 80.26,95.83 80.26,87.898 62,87.898 60.96,86.858 60.96,32.79 62,31.75 144.82,31.75 145.86,32.79 145.86,57.252

## Dimensions
63.193,34.425 to 62,31.75 on Mechanical 1
84.96,92.148 to 62,31.75 on Mechanical 1
143.032,34.748 to 145.86,32.79 on Mechanical 1
82.241,97.811 to 63.335,53.035 on Mechanical 1
144.82,31.75 to 142.673,68.994 on Mechanical 1
143.032,34.748 to 144.82,31.75 on Mechanical 1
63.193,34.425 to 145.86,32.79 on Mechanical 1
82.241,97.811 to 62,31.75 on Mechanical 1
60.96,86.858 to 145.554,95.347 on Mechanical 1
142.312,39.678 to 144.82,31.75 on Mechanical 1
142.673,68.994 to 144.812,57.34 on Mechanical 1
142.673,68.994 to 145.599,56.553 on Mechanical 1
142.312,39.678 to 145.599,37.553 on Mechanical 1
142.312,39.678 to 144.812,36.766 on Mechanical 1
128.673,65.665 to 145.599,56.553 on Mechanical 1
142.312,54.428 to 128.673,68.994 on Mechanical 1
142.312,54.428 to 142.312,39.678 on Mechanical 1

## Text inside footprints (layer, text, board x,y; h text height)
U4: Top Overlay "ANALOG DEVICES" at 126.599,49.09 h0.6 r90; Top Overlay "P1" at 130.939,38.407 h0.8 r90; Top Overlay "P2" at 130.939,54.428 h0.8 r90; Top Overlay "STBY" at 140.492,45.887 h0.8 r90; Top Overlay "ADXL 355Z" at 130.692,44.073 h0.8 r90